# Altium PCB MAGIsUSBCore.PcbDoc
Units mm, origin at the board's own origin, x right, y up, seen from the top; angles counter-clockwise.
Board outline 152.4 x 101.6 mm, 2 copper layers (Top Layer, Bottom Layer); 26 components, 36 nets, 126 pads, 58 vias.
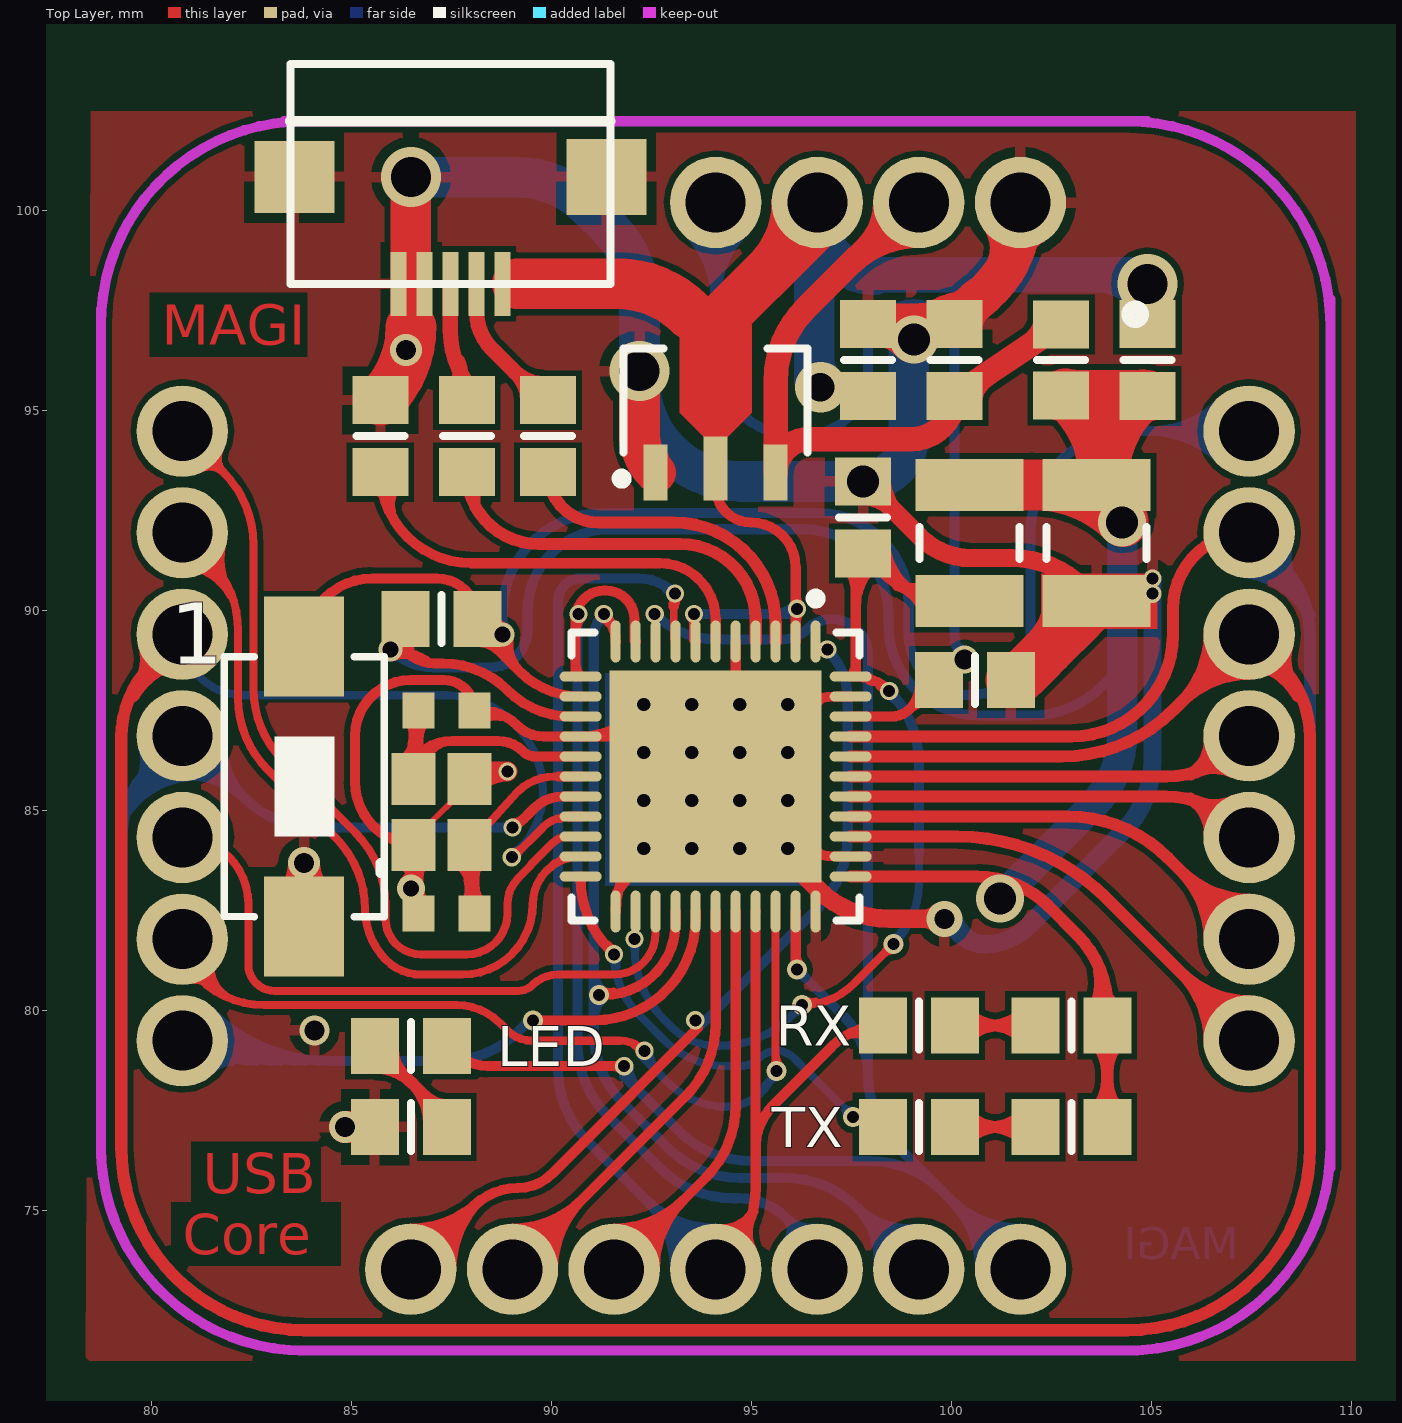
[diagram p0: Top Layer view]
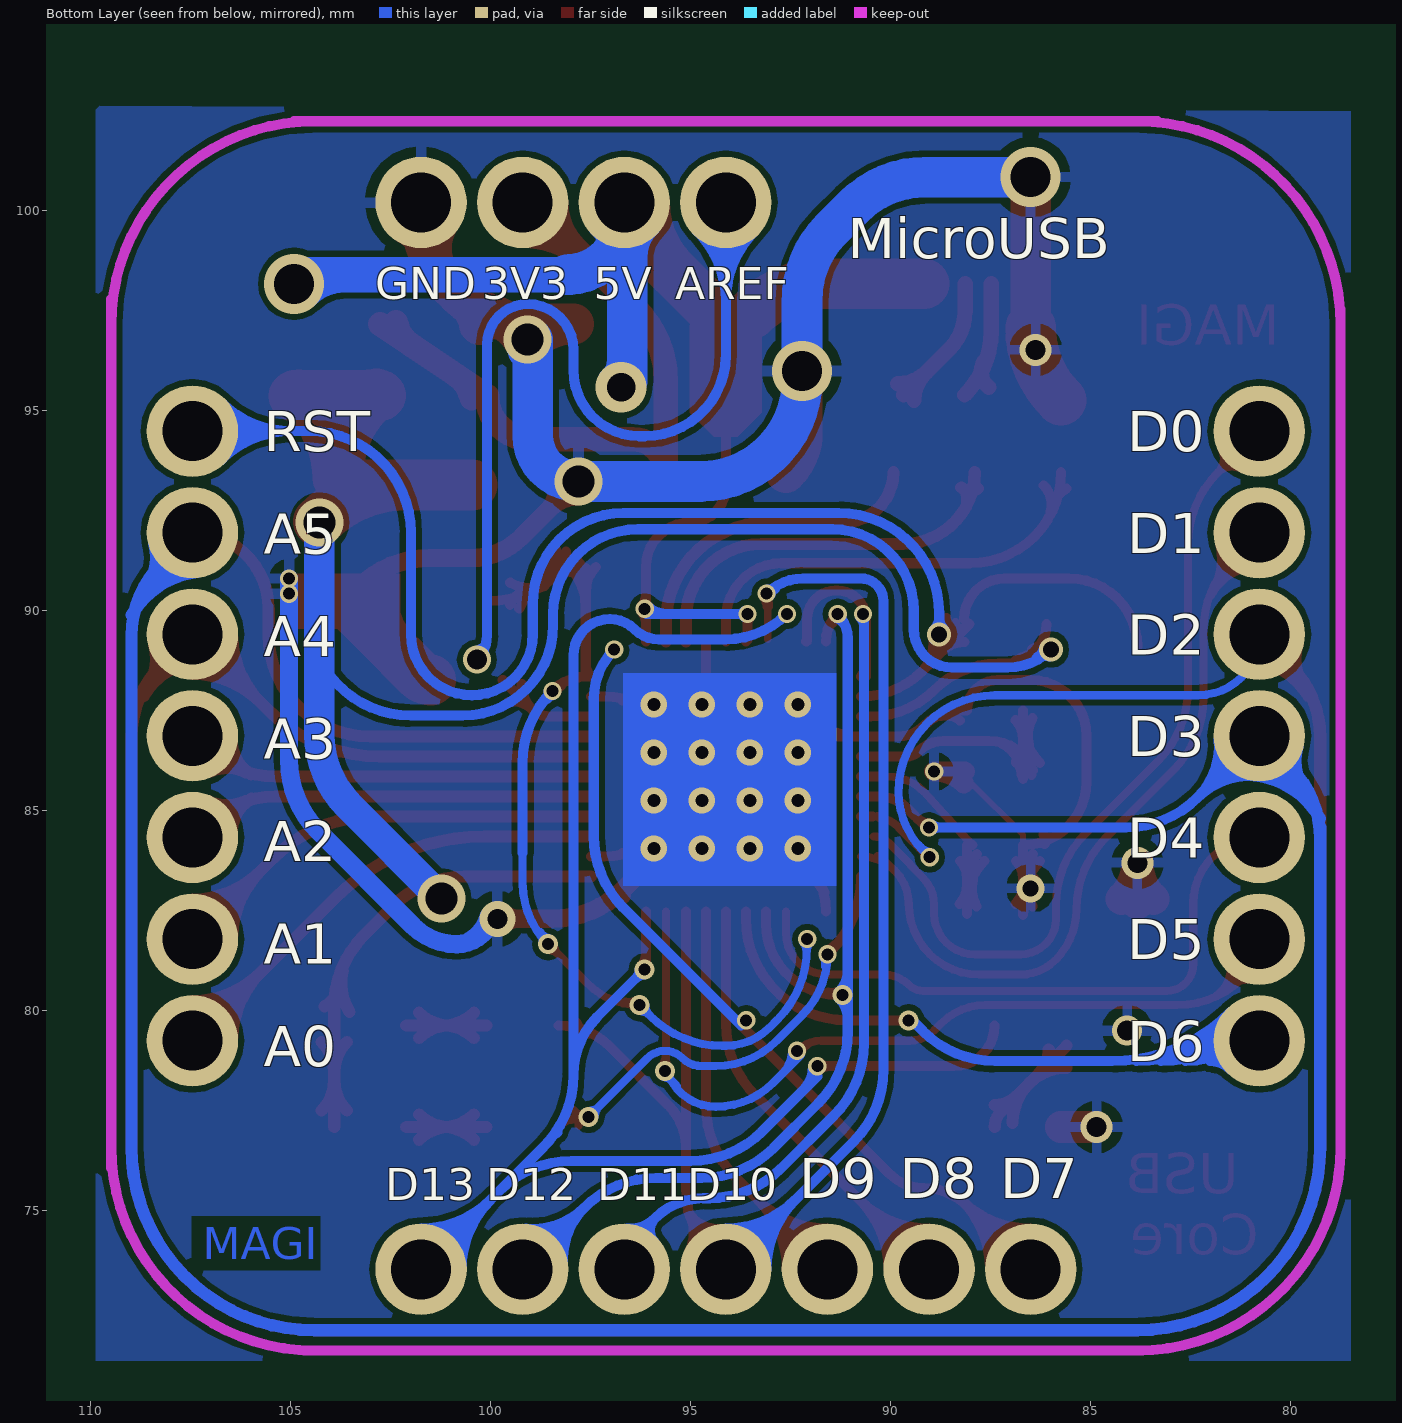
[diagram p1: Bottom Layer view, seen from below]

## Layer stack, top to bottom
Top Solder: solder mask 0.0102, Solder Resist, Dk 3.5
Top Layer: signal copper 0.0356
Dielectric1: dielectric 0.32, FR-4, Dk 4.8
Bottom Layer: signal copper 0.0356
Bottom Solder: solder mask 0.0102, Solder Resist, Dk 3.5

## Board outline
25.4,25.4 177.8,25.4 177.8,127 25.4,127

## Design rules (kind name [scope] priority, off if disabled: settings)
Clearance [All] p1: gap=0.152
PolygonConnect [All] p1: connectstyle=Relief reliefconductorwidth=0.254 reliefentries=4 polygonreliefangle="90 Angle" airgapwidth=0.254
RoutingVias [All] p1: holewidth=0.4 width=0.5 viastyle="Through Hole" minholewidth=0.3 minwidth=0.4 maxholewidth=0.711 maxwidth=1.27
SolderMaskExpansion [All] p1: expansion=0.102
Width [All] p1: maxlimit=2.54 minlimit=0.152 preferedwidth=0.254
29 further rules are at their usual default settings.

## Components (designator, comment, footprint, x,y, rotation, side; value= is the part's Value field where it differs from the comment)
1 "SW-PB" SW-1-SMD 83.82,85.598 r0 top (schematic designator S1)
C1 "10uf" 6-0805_N#1 97.917,96.266 r90 top
C2 "10uf" 6-0805_N#1 100.076,96.266 r90 top
C3 "CAP_1" 6-0805_N#1 85.725,94.361 r90 top
C4 "CAP_1" 6-0805_N#1 100.584,88.265 r180 top
C5 "CAP_1" 6-0805_N#1 97.79,92.329 r270 top
C6 "CAP_1" C1210_N 103.632,91.694 r90 top
C7 "CAP_1" 1608[0603] 87.376,87.503 r180 top
C8 "CAP_1" 1608[0603] 87.376,82.423 r180 top
Cry1 "SMD-Crystal" 3225 87.249,84.963 r90 top
J1 "MAGI-M8" MAGI-M8 94.107,86.868 r0 top
L1 "INDUCTOR" C1210_N 100.457,91.694 r90 top
LED1 "LED_3" 6-0805_N#1 99.187,79.629 r180 top
LED2 "LED_3" 6-0805_N#1 99.187,77.089 r180 top
LED3 "LED_3" 6-0805_N#1 86.487,77.089 r180 top
R1 "RES1" 6-0805_N#1 89.916,94.361 r270 top
R2 "RES1" 6-0805_N#1 87.884,94.361 r270 top
R3 "000" 6-0805_N#2 102.743,96.266 r270 top
R4 "000" 6-0805_N#1 104.902,96.266 r90 top
R5 "RES1" 6-0805_N#1 87.249,89.789 r180 top
R6 "RES1_1" 6-0805_N#1 102.997,79.629 r0 top
R7 "RES1_1" 6-0805_N#1 102.997,77.089 r0 top
R8 "RES1_1" 6-0805_N#1 86.487,79.121 r0 top
U1 "HS7333" HS7333 94.107,95.25 r90 top
U2 "USB" MicroUSB 87.63,100.711 r0 top
U3 "ATmega32U4-MU" 44PW_N 94.107,85.852 r270 top

## Footprints (in the part's own frame and the unit in brackets; to place one, negate y for a bottom-side part, rotate by r counter-clockwise, add the part's x,y. Pads: shape width x height; smd on the part's side, far side on the other; paste and mask are expansions set on the pad)
6-0805_N#1 [mm] "Chip Resistor, Body 2.0x1.2mm, IPC Medium Density"
  rect 1.2x1.4 smd: 1(-0.9,0) 2(0.9,0)
  silkscreen extent 0,-0.6 0,0.6, body extent -1.07,-0.7 1.07,0.7, height 0.7
6-0805_N#2 [mm] "Chip Resistor, Body 2.0x1.2mm, IPC Medium Density"
  rect 1.2x1.4 smd: 1(-0.889,0) 2(0.889,0)
  silkscreen extent 0,-0.6 0,0.6, body extent -1.07,-0.7 1.07,0.7, height 0.7
44PW_N [mm] "QFN, 44-Leads, Body 7x7mm, Pitch 0.5mm, IPC Medium Density"
  oval 1.05x0.25 smd: 1(-3.375,2.5) 2(-3.375,2) 3(-3.375,1.5) 4(-3.375,1) 5(-3.375,0.5) 6(-3.375,0) 7(-3.375,-0.5) 8(-3.375,-1) 9(-3.375,-1.5) 10(-3.375,-2) 11(-3.375,-2.5) 23(3.375,-2.5) 24(3.375,-2) 25(3.375,-1.5) 26(3.375,-1) 27(3.375,-0.5) 28(3.375,0) 29(3.375,0.5) 30(3.375,1) 31(3.375,1.5) 32(3.375,2) 33(3.375,2.5)
  oval 0.25x1.05 smd: 12(-2.5,-3.375) 13(-2,-3.375) 14(-1.5,-3.375) 15(-1,-3.375) 16(-0.5,-3.375) 17(0,-3.375) 18(0.5,-3.375) 19(1,-3.375) 20(1.5,-3.375) 21(2,-3.375) 22(2.5,-3.375) 34(2.5,3.375) 35(2,3.375) 36(1.5,3.375) 37(1,3.375) 38(0.5,3.375) 39(0,3.375) 40(-0.5,3.375) 41(-1,3.375) 42(-1.5,3.375) 43(-2,3.375) 44(-2.5,3.375)
  rect 5.3x5.3 smd: 45(0,0)
  silkscreen extent -4.57,-3.6 3.6,3.6, body extent -3.57,-3.57 3.57,3.57, height 1
1608[0603] [mm] "Chip Capacitor, Body 1.6x0.8mm, IPC High Density"
  rect 0.8x0.9 smd: 1(-0.7,0) 2(0.7,0)
  body extent -0.87,-0.48 0.87,0.48, height 1.3
3225 [mm] "SMD3225"
  rect 1.3x1.1 smd: 1(-0.826,-0.699) 2(0.826,-0.698) 3(0.826,0.699) 4(-0.826,0.698)
  silkscreen extent -1.52,1.52 -1.27,1.52
C1210_N [mm] "Chip Capacitor, Body 3.2x2.5mm, IPC Medium Density"
  rect 1.3x2.7 smd: 1(-1.45,0) 2(1.45,0)
  silkscreen extent -0.4,-1.25 0.4,1.25, body extent -1.7,-1.35 1.7,1.35, height 1.5
HS7333 [mm] "SOT89, 3-Leads, Body 4.50x2.50mm, Pitch 1.50mm, Lead Span 4.1mm, IPC Medium Density"
  rect 1.4x0.6 smd: 1(-1.8,1.5) 3(-1.8,-1.5)
  rect 1.6x0.6 smd: 2(-1.7,0)
  Top Layer region: -0.9,0.3 -0.3,0.9 1.9,0.9 2.5,0.3 2.5,-0.3 1.9,-0.9 -0.3,-0.9 -0.9,-0.3
  silkscreen extent -2.07,-2.3 1.3,2.47, body extent -1.3,-2.3 1.3,2.3, height 1.6
MAGI-M8 [mil]
  round 90 hole 59.06: 1(300,525) 2(200,525) 3(100,525) 4(0,525) 8(-525,300) 9(-525,200) 10(-525,100) 11(-525,0) 12(-525,-100) 13(-525,-200) 14(-525,-300) 15(-300,-525) 16(-200,-525) 17(-100,-525) 18(0,-525) 19(100,-525) 20(200,-525) 21(300,-525) 22(525,-300) 23(525,-200) 24(525,-100) 25(525,0) 26(525,100) 27(525,200) 28(525,300)
  Keep-Out Layer lines w10: -605,-415 -605,290 -605,420 ; -605,-405 ccw(c-405,-405) -405,-605 ; -605,405 cw(c-405,405) -405,605 ; -425,605 425,605 ; -410,-605 415,-605 ; 405,-605 ccw(c405,-405) 605,-405 ; 405,605 cw(c405,405) 605,405 ; 605,-425 605,430
MicroUSB [mm]
  rect 0.4x1.6 smd: 1(1.143,-2.54) 2(0.493,-2.54) 3(-0.157,-2.54) 4(-0.807,-2.54) 5(-1.457,-2.54)
  rect 2x1.8 smd: 6(-4.057,0.135)
  rect 2x1.9 smd: 7(3.743,0.135)
  silkscreen extent -4.16,-2.54 3.84,2.96, body extent -4.26,-2.64 3.94,3.06, height 3
SW-1-SMD [mm]
  rect 2x2.5 smd: 1(0,3.5) 2(0,-3.5)
  silkscreen extent -2,-3.25 2,3.25

## Part data
C1 C2: library part "CAPACITOR POL", "Capacitor"
C3 C4 C5 C6 C7 C8: "Capacitor"
Cry1: library part Crystal
R3 R4: library part RES1
U3: "8-bit AVR Microcontroller, 2.7-5.5V, 32KB Flash, 2.5KB EEPROM, 1KB SRAM, USB Controller, 44-pin QFN, Industrial Grade (-40癈 to 85癈)"

## Via types
v1: diameter 0.66, hole 0.33, Top Layer to Bottom Layer, tented top, 16 vias
v2: diameter 0.457, hole 0.3, Top Layer to Bottom Layer, 9 vias
v3: diameter 0.5, hole 0.3, Top Layer to Bottom Layer, 7 vias
v4: diameter 0.46, hole 0.3, Top Layer to Bottom Layer, 5 vias
v5: diameter 0.452, hole 0.3, Top Layer to Bottom Layer, 4 vias
v6: diameter 1.2, hole 0.8, Top Layer to Bottom Layer, 4 vias
v7: diameter 0.8, hole 0.5, Top Layer to Bottom Layer, 3 vias
v8: diameter 1.5, hole 1, Top Layer to Bottom Layer, 3 vias
v9: diameter 0.6, hole 0.4, Top Layer to Bottom Layer, 2 vias
v10: diameter 0.7, hole 0.4, Top Layer to Bottom Layer, 1 vias
v11: diameter 0.9, hole 0.5, Top Layer to Bottom Layer, 1 vias
v12: diameter 1.27, hole 0.711, Top Layer to Bottom Layer, 1 vias
v13: diameter 0.7, hole 0.5, Top Layer to Bottom Layer, 1 vias
v14: diameter 0.75, hole 0.5, Top Layer to Bottom Layer, 1 vias

## Nets (pads, with @x,y where several pads share a name; then routed paths per layer and width w, separated by ;. In a path a pad name is that pad's centre, name@x,y a point inside that pad or via, vN(x,y) a via of type N, cw(c..) or ccw(c..) an arc to the next point about the centre after c; other vN are vias at no path point)
3.3V: C2.1 J1.2 R3.1 U1.3 | length 21.6
  Top Layer w0.61: 97.45,98.645 cw(c99.187,96.908) J1.2@99.187,99.365 ; 97.883,99.079 ccw(c96.759,100.203) J1.2@98.349,100.203 ; J1.2 99.007,100.203 96.351,97.547 ccw(c98.147,95.751) 95.607,95.751 U1.3 cw(c96.443,93.45) 96.443,94.286 98.996,94.286 ccw(c98.996,95.366) C2.1 R3.1 ; C2.1@100.466,95.309 cw(c101.351,95.134) 100.849,95.884 ; 101.97,96.637 ccw(c101.468,97.387) R3.1@102.353,97.212
5V: C1.1 J1.3 R4.2 U1.2 U2.1 U3.2 U3.7 | length 41.2
  Top Layer w0.254: v5@93.495,89.846 cw(c93.326,89.677) 93.566,89.677 cw(c93.805,89.677) v5@93.636,89.846 ; v5(93.566,89.916) 93.566,89.268 U3.7 ; 94.107,95.123 U1.2 94.107,93.091 ccw(c94.996,93.091) 94.996,92.202 cw(c94.996,91.091) 96.107,91.091 U3.2 ; U3.2@96.107,89.717 cw(c96.465,89.717) v4@96.212,89.97 ; 96.107,90.369 ccw(c96.465,90.369) v4@96.212,90.116
  Top Layer w1.27: 89.154,98.171 91.785,98.171 ; 91.658,98.171 cw(c91.658,95.631) 93.454,97.427 ; 93.853,96.901 J1.3@96.584,99.632 ; 95.421,98.469 ccw(c93.686,100.203) J1.3@96.139,100.203
  Bottom Layer w0.254: v5(93.566,89.916) v4@96.086,89.916 ; v5@93.636,89.846 cw(c93.805,89.677) 93.805,89.916 cw(c93.805,90.155) v5@93.636,89.986 ; 95.584,89.916 ccw(c95.584,90.598) v4@96.066,90.116
  Bottom Layer w0.889: 98.005,98.402 104.902,98.402 v8(104.902,98.171) ; 103.607,98.402 cw(c103.607,96.876) v8@104.686,97.955
  Bottom Layer w1.016: J1.3@96.198,99.754 cw(c95.295,98.851) 96.572,98.851 ; 96.572,96.263 ccw(c97.405,96.263) v12@96.816,95.674 ; 96.572,98.489 cw(c98.361,98.489) J1.3@97.096,99.754 ; v12(96.726,95.584) 96.572,95.738 96.572,100.022 cw(c96.828,100.022) J1.3 96.647,99.839 ccw(c98.086,99.839) 98.005,98.402 ccw(c98.086,99.839) 98.086,98.4
  other v4: 96.139,90.043
A0: J1.22 U3.36 | length 18.2
  Top Layer w0.305: U3.36 100.149,84.352 cw(c100.149,79.067) 103.886,82.804 J1.22 ; J1.22@106.451,79.248 ccw(c104.06,79.248) 105.751,80.939 ccw(c107.442,82.63) J1.22@107.442,80.239 ; J1.22@106.756,79.248 ccw(c105.101,79.248) 106.271,80.419 ccw(c107.442,81.589) J1.22@107.442,79.934
A1: J1.23 U3.37 | length 17.4
  Top Layer w0.305: U3.37 102.919,84.852 cw(c102.919,81.329) 105.41,83.82 J1.23 ; J1.23@106.451,81.788 ccw(c104.06,81.788) 105.751,83.479 ccw(c107.442,85.17) J1.23@107.442,82.779 ; J1.23@106.756,81.788 ccw(c105.101,81.788) 106.271,82.959 ccw(c107.442,84.129) J1.23@107.442,82.474
A2: J1.24 U3.38 | length 14
  Top Layer w0.305: U3.38 105.366,85.352 cw(c105.366,82.812) 107.162,84.608 J1.24 ; 106.396,85.05 cw(c106.033,84.421) J1.24@106.758,84.373 ; J1.24@106.454,84.393 ccw(c105.489,84.457) 105.972,85.295 ccw(c106.567,86.326) J1.24@107.045,85.235 ; 106.494,84.994 ccw(c106.867,85.64) J1.24@107.167,84.956
A3: J1.25 U3.39 | length 14.7
  Top Layer w0.305: U3.39 105.374,85.852 ccw(c105.374,88.392) 107.17,86.596 J1.25 J1.25@106.68,86.868 ; 106.404,86.154 ccw(c106.048,86.77) J1.25@106.758,86.82 ; J1.25@106.454,86.799 cw(c105.507,86.732) 105.982,85.91 cw(c106.562,84.904) J1.25@107.037,85.964 ; 106.498,86.208 cw(c106.863,85.576) J1.25@107.162,86.242
A4: J1.10 J1.26 U3.19 U3.40 | length 103.1
  Top Layer w0.203: v2(89.012,83.835) 89.042,83.835 89.789,84.582 cw(c90.441,83.93) U3.19@90.441,84.852 ; v2@89.012,83.962 ccw(c89.012,84.341) 89.28,84.073 ; v2@89.139,83.835 cw(c89.373,83.835) 89.208,84.001 ; 90.219,84.793 ccw(c90.18,84.94) U3.19@90.312,84.864
  Top Layer w0.254: U3.19@90.441,84.852 U3.19
  Top Layer w0.305: 79.556,87.873 cw(c81.056,87.007) J1.10@80.853,88.727 ; 79.674,88.077 ccw(c78.447,88.785) J1.10@79.815,89.152 ; 79.86,88.4 cw(c80.967,87.761) J1.10@80.817,89.03 ; J1.10 79.992,88.628 ccw(c81.788,86.832) 79.248,86.832 79.248,76.581 ccw(c83.82,76.581) 83.82,72.009 104.394,72.009 ccw(c104.394,76.581) 108.966,76.581 108.966,86.832 ccw(c106.426,86.832) 108.222,88.628 J1.26 105.537,87.503 cw(c102.758,90.282) 102.758,86.352 U3.40 ; J1.26@106.451,89.408 cw(c104.06,89.408) 105.751,87.717 cw(c107.442,86.026) J1.26@107.442,88.417 ; J1.26@106.756,89.408 cw(c105.101,89.408) 106.271,88.237 cw(c107.442,87.067) J1.26@107.442,88.722 ; J1.26@107.361,88.727 cw(c107.158,87.007) 108.658,87.873 ; J1.26@107.397,89.03 cw(c107.247,87.761) 108.354,88.4 ; J1.26@108.399,89.152 ccw(c109.767,88.785) 108.54,88.077
  Bottom Layer w0.203: J1.10 ccw(c82.296,89.408) 82.296,87.884 87.375,87.884 cw(c87.375,85.471) 89.788,85.471 cw(c87.71,85.471) 89.179,84.002 v2(89.012,83.835) ; v2@88.991,83.96 ccw(c88.917,84.396) 89.277,84.14
A5: J1.11 J1.27 U3.18 U3.41 | length 104.2
  Top Layer w0.254: v5@89.027,84.681 ccw(c89.027,85.082) 89.31,84.799 ; v5@89.154,84.642 89.568,85.057 cw(c90.281,84.344) 90.281,85.352 U3.18
  Top Layer w0.305: U3.41 102.997,86.852 ccw(c102.997,89.392) 105.537,89.392 105.537,90.043 cw(c107.442,90.043) J1.27
  Bottom Layer w0.254: J1.11 82.314,85.326 ; J1.11@80.838,86.109 cw(c80.957,84.74) 81.928,85.712 cw(c82.9,86.683) J1.11@81.531,86.802 ; J1.11@80.86,85.856 cw(c81.018,84.03) 82.314,85.326 ; J1.11@81.784,86.78 ccw(c83.61,86.622) 82.314,85.326 ; v5@88.957,84.512 ccw(c88.788,84.343) 88.788,84.582 ccw(c88.788,84.821) v5@88.957,84.652 ; v5(89.027,84.582) 84.11,84.582 cw(c84.11,87.122) 82.314,85.326
  Bottom Layer w0.305: 79.248,84.292 cw(c81.788,84.292) 79.992,86.088 J1.11 ; 79.248,84.582 79.248,76.581 ccw(c83.82,76.581) 83.82,72.009 104.394,72.009 ccw(c104.394,76.581) 108.966,76.581 108.966,89.372 ccw(c106.426,89.372) 108.222,91.168 J1.27 ; 79.252,84.807 cw(c81.145,83.714) J1.11@80.888,85.884 ; 79.556,85.333 cw(c81.056,84.467) J1.11@80.853,86.187 ; 79.674,85.537 ccw(c78.447,86.245) J1.11@79.815,86.612 ; 79.86,85.86 cw(c80.967,85.221) J1.11@80.817,86.49 ; J1.27@107.326,90.964 cw(c107.069,88.794) 108.962,89.887 ; J1.27@107.361,91.267 cw(c107.158,89.547) 108.658,90.413 ; J1.27@107.397,91.57 cw(c107.247,90.301) 108.354,90.94 ; J1.27@108.399,91.692 ccw(c109.767,91.325) 108.54,90.617
AREF: C4.2 J1.4 U3.42 | length 34.8
  Top Layer w0.254: U3.42 98.505,87.352 ccw(c98.505,87.994) 98.959,87.54 ; C4.2@99.211,88.159 cw(c98.35,88.149) 98.959,87.54 ; C4.2@99.567,87.707 ccw(c99.409,87.09) 98.959,87.54 ; C4.2 98.959,87.54
  Bottom Layer w0.254: J1.4@93.389,99.485 cw(c91.654,97.75) 94.107,97.75 cw(c96.56,97.75) J1.4@94.825,99.485 ; J1.4@93.568,99.664 cw(c92.267,98.363) 94.107,98.363 cw(c95.947,98.363) J1.4@94.646,99.664 ; J1.4@93.748,99.844 cw(c92.881,98.977) 94.107,98.977 cw(c95.333,98.977) J1.4@94.466,99.844 ; J1.4 94.107,96.393 ccw(c96.139,96.393) 96.139,94.361 96.266,94.361 ccw(c96.266,96.012) 97.917,96.012 97.917,96.52 cw(c99.06,96.52) 99.06,97.663 cw(c99.06,96.647) 100.076,96.647 100.076,89.386 ccw(c100.943,89.386) v13(100.33,88.773) ; v13@100.124,88.86 ccw(c99.811,88.992) 100.106,89.162 ccw(c100.4,89.332) v13@100.358,88.994
AVCC: C5.2 L1.1 U3.24 U3.44 | length 33.5
  Top Layer w0.203: v3(96.266,80.137) ccw(c96.266,81.977) 97.567,80.676 v3(98.552,81.661) ; v3@96.343,80.264 ccw(c96.531,80.569) 96.614,80.221 ccw(c96.698,79.872) v3@96.393,80.06 ; v3@98.404,81.661 cw(c98.045,81.661) 98.299,81.408 cw(c98.552,81.154) v3@98.552,81.513
  Top Layer w0.254: C5.2@97.356,91.095 cw(c96.744,90.483) 97.609,90.483 ; U3.44 97.602,88.352 cw(c97.602,87.188) U3.44@97.609,88.352 ; U3.44 ccw(c97.18,88.654) 97.609,88.654 ; 97.609,90.092 cw(c99.027,90.092) C5.2@98.024,91.095 ; 97.609,90.705 cw(c98.414,90.705) C5.2@97.845,91.274 ; C5.2@97.609,91.059 U3.44@97.609,88.352 ; C5.2 98.231,90.988 ccw(c100.027,92.784) L1.1@100.027,90.244 ; U3.44@97.88,88.351 ccw(c98.091,88.471) 98.027,88.237 ; C5.2@97.983,90.965 cw(c98.088,90.441) C5.2@98.384,90.886 ; C5.2@98.105,91.472 ccw(c99.219,91.695) 98.589,90.75 ; v2@98.344,87.969 ccw(c98.106,87.91) 98.233,88.12 ccw(c98.36,88.33) v2@98.419,88.091 ; C5.2@98.354,91.522 ccw(c100.069,91.866) 99.099,90.41 ; v2(98.443,87.993) ccw(c97.602,87.188) U3.44@97.609,88.352 ; 98.64,90.616 cw(c98.397,89.71) L1.1@99.27,90.053 ; 98.718,90.595 ccw(c98.984,91.584) L1.1@99.495,90.697 ; L1.1@99.126,90.485 cw(c98.98,89.939) L1.1@99.507,90.146
  Bottom Layer w0.203: v2@91.997,81.688 cw(c91.864,81.518) 92.078,81.544 ; v2(92.075,81.788) 92.075,81.57 ccw(c94.615,81.57) 92.819,79.774 93.023,79.57 ccw(c94.107,80.654) 94.107,79.121 94.198,79.121 ccw(c94.198,81.661) 95.994,79.865 v3(96.266,80.137) ; 92.094,81.417 cw(c92.488,81.465) v2@92.175,81.71 ; v3@96.118,80.137 cw(c95.759,80.137) 96.013,79.884 cw(c96.266,79.63) v3@96.266,79.989 ; v3@98.52,81.806 ccw(c98.442,82.156) 98.744,81.963 ccw(c99.047,81.771) v3@98.697,81.693 ; v3(98.552,81.661) ccw(c97.019,83.194) 99.187,83.194 99.187,83.947
  Bottom Layer w0.254: v2@98.421,87.893 cw(c98.37,87.653) 98.577,87.786 ; v2@98.425,88.011 v2(98.443,87.993) cw(c96.647,86.197) 99.187,86.197 99.187,83.947 ; v2@98.542,87.971 ccw(c98.781,87.92) 98.576,87.787
D0: J1.8 U3.20 | length 23
  Top Layer w0.203: J1.8 81.806,93.454 ; J1.8@81.138,93.734 cw(c81.316,93.368) 81.604,93.656 cw(c81.892,93.944) J1.8@81.526,94.122 ; J1.8@81.227,93.551 cw(c81.448,93.096) 81.806,93.454 ; J1.8@81.709,94.033 ccw(c82.164,93.812) 81.806,93.454 ; U3.20@90.409,84.352 ccw(c90.409,83.832) 90.042,84.2 89.495,83.653 89.495,83.635 89.172,83.312 ccw(c89.827,82.656) 88.9,82.656 88.9,82.423 cw(c87.884,82.423) 87.884,81.407 86.741,81.407 cw(c86.741,82.296) 85.852,82.296 85.852,82.641 ccw(c83.312,82.641) 85.108,84.437 83.294,86.251 cw(c85.09,88.047) 82.55,88.047 82.55,91.658 ccw(c80.01,91.658) 81.806,93.454
D1: J1.9 U3.21 | length 25.3
  Top Layer w0.203: J1.9@80.768,91.11 cw(c80.763,89.743) 81.934,90.447 ; J1.9@80.769,91.313 cw(c80.764,90.165) 81.749,90.756 ; J1.9@80.77,91.516 cw(c80.766,90.587) 81.563,91.065 ; J1.9 81.425,91.295 cw(c79.629,89.499) 82.169,89.499 82.169,87.811 ccw(c84.709,87.811) 82.913,86.015 84.6,84.328 cw(c82.804,82.531) 85.344,82.531 ccw(c87.139,82.531) 85.87,81.262 ccw(c86.747,82.139) 86.747,80.899 87.768,80.899 ccw(c87.768,82.666) 89.535,82.666 cw(c90.713,82.666) 89.88,83.499 cw(c90.732,82.647) U3.21 ; J1.9@81.585,91.745 ccw(c82.807,91.44) 81.727,90.791 ; J1.9@81.782,91.696 ccw(c83.48,91.272) 81.98,90.371 ; 90.063,83.673 ccw(c89.957,84.069) U3.21@90.312,83.864
D4: J1.12 U3.25 | length 15.9
  Top Layer w0.203: J1.12 cw(c80.772,82.677) 82.423,82.677 82.423,81.153 ccw(c83.083,81.153) 83.083,80.493 89.167,80.493 ccw(c89.167,81.013) 89.535,80.645 cw(c90.148,80.032) 90.148,80.899 91.567,80.899 ccw(c91.567,81.939) 92.607,81.939 U3.25
D5: J1.13 U3.31 | length 26.6
  Top Layer w0.203: J1.13@80.874,81.27 ccw(c81.233,81.27) 80.979,81.016 81.171,80.825 ccw(c82.831,82.485) 82.831,80.137 87.63,80.137 cw(c87.63,78.604) 88.714,79.688 88.9,79.502 ccw(c89.513,80.115) 89.513,79.248 91.716,79.248 cw(c91.716,78.381) v2(92.329,78.994) ; J1.13@80.967,80.765 cw(c81.072,80.215) 81.387,80.678 ; J1.13@81.171,81.622 ccw(c81.931,81.305) 81.468,80.623 ; J1.13@81.358,81.544 ccw(c82.166,81.207) 81.674,80.483 ; J1.13@81.546,81.465 ccw(c82.401,81.109) 81.88,80.343 ; v2@92.206,78.961 ccw(c91.91,78.882) 92.063,79.147 ccw(c92.217,79.413) v2@92.296,79.117 ; v3@95.526,78.591 ccw(c95.331,78.786) 95.607,78.786 ; v3@95.607,78.486 U3.31 ; 95.607,78.902 ccw(c96.047,78.902) v3@95.736,78.591
  Bottom Layer w0.203: v2@92.227,78.892 92.928,78.191 ccw(c94.361,79.624) 94.361,77.597 ccw(c94.361,78.867) v3@95.577,78.502 ; v2@92.456,78.994 ccw(c93.256,78.994) 92.69,78.428 ; 95.328,78.099 cw(c95.79,77.813) v3@95.665,78.342
  other v3: 95.631,78.486
D6: J1.14 U3.27 | length 24.1
  Top Layer w0.254: v3(89.535,79.756) 91.067,79.756 ccw(c91.067,82.296) 93.607,82.296 U3.27
  Bottom Layer w0.254: J1.14@80.952,79.428 ccw(c82.612,81.088) 82.612,78.74 ; J1.14@81.131,79.607 ccw(c83.225,81.701) 83.225,78.74 ; J1.14@81.28,78.74 cw(c81.28,79.248) J1.14 ccw(c81.998,80.474) 81.998,78.74 ccw(c81.998,78.022) J1.14@81.49,78.53 ; J1.14@81.311,79.787 ccw(c83.838,82.314) 83.838,78.74 ; J1.14@81.49,79.966 ccw(c84.451,82.927) 84.451,78.74 87.38,78.74 ccw(c87.38,81.28) 89.176,79.484 89.448,79.756 v3(89.535,79.756)
D7: J1.15 U3.1 | length 29.2
  Top Layer w0.254: J1.15 88.07,75.116 cw(c89.154,74.032) 89.154,75.565 ccw(c89.154,76.791) 90.021,75.924 90.38,76.283 v2@93.662,79.566 ; J1.15@86.487,74.041 ccw(c86.487,75.267) 87.354,74.4 ccw(c88.221,73.533) J1.15@86.995,73.533 ; J1.15@86.487,74.295 ccw(c86.487,76.135) 87.788,74.834 ccw(c89.089,73.533) J1.15@87.249,73.533 ; J1.15@86.487,74.549 ccw(c86.487,77.002) 88.221,75.267 ccw(c89.956,73.533) J1.15@87.503,73.533
  Bottom Layer w0.254: v2@93.726,79.629 96.665,82.568 ccw(c94.869,84.364) 97.409,84.364 97.409,87.801 ccw(c95.675,87.801) v4(96.901,89.027)
  other v2: 93.599,79.756
D8: J1.16 U3.28 | length 19.6
  Top Layer w0.254: J1.16 93.363,77.869 ccw(c91.567,79.665) 94.107,79.665 U3.28 ; J1.16@89.027,74.041 ccw(c89.027,75.267) 89.894,74.4 ccw(c90.761,73.533) J1.16@89.535,73.533 ; J1.16@89.027,74.295 ccw(c89.027,76.135) 90.328,74.834 ccw(c91.629,73.533) J1.16@89.789,73.533 ; J1.16@89.027,74.549 ccw(c89.027,77.002) 90.761,75.267 ccw(c92.496,73.533) J1.16@90.043,73.533
D9: J1.17 U3.29 | length 18.8
  Top Layer w0.254: J1.17 93.863,75.829 ccw(c92.067,77.625) 94.607,77.625 U3.29 ; J1.17@91.567,74.041 ccw(c91.567,75.267) 92.434,74.4 ccw(c93.301,73.533) J1.17@92.075,73.533 ; J1.17@91.567,74.295 ccw(c91.567,76.135) 92.868,74.834 ccw(c94.169,73.533) J1.17@92.329,73.533 ; J1.17@91.567,74.549 ccw(c91.567,77.002) 93.301,75.267 ccw(c95.036,73.533) J1.17@92.583,73.533
D10: J1.18 LED1.2 U3.8 U3.30 | length 50.5
  Top Layer w0.178: U3.8@93.06,89.274 93.06,90.172
  Top Layer w0.254: 93.06,90.11 cw(c93.405,90.11) v5@93.161,90.354 ; 93.06,90.171 cw(c93.273,90.171) v5@93.149,90.343 ; 93.06,90.172 93.091,90.203 v5(93.091,90.424) ; J1.18 94.363,73.789 ccw(c92.567,75.585) 95.107,75.585 95.107,76.581 ; J1.18@94.183,74.291 ccw(c94.251,74.98) 94.851,74.634 ; J1.18@94.208,74.544 ccw(c94.294,75.409) 95.047,74.975 ccw(c95.954,74.451) J1.18@95.017,73.985 ; J1.18@94.789,73.872 cw(c95.445,74.198) 94.811,74.565 ; U3.30 95.102,82.472 95.102,77.094 95.107,77.089 95.107,76.581 ; LED1.2@97.847,79.702 cw(c97.425,79.867) 97.542,79.429 cw(c97.62,79.14) LED1.2@97.878,79.291 ; LED1.2 ccw(c98.287,77.816) 97.005,79.098 95.545,77.638 ccw(c96.601,76.581) 95.107,76.581
  Bottom Layer w0.254: v5@92.995,90.398 ccw(c92.764,90.336) 92.884,90.544 ccw(c93.003,90.751) v5@93.065,90.52 ; J1.18@93.091,73.533 ccw(c90.638,73.533) 92.373,75.267 ccw(c94.107,77.002) J1.18@94.107,74.549 ; v5(93.091,90.424) ccw(c92.171,89.504) 92.171,90.805 90.734,90.805 ccw(c90.734,90.24) 90.169,90.24 90.169,78.524 ccw(c92.709,78.524) 90.913,76.727 J1.18 ; J1.18@93.345,73.533 ccw(c91.505,73.533) 92.806,74.834 ccw(c94.107,76.135) J1.18@94.107,74.295 ; J1.18@93.599,73.533 ccw(c92.373,73.533) 93.24,74.4 ccw(c94.107,75.267) J1.18@94.107,74.041
D11: J1.19 U3.10 U3.12 | length 27
  Top Layer w0.254: U3.12@90.605,88.352 90.605,89.792 cw(c91.313,89.792) 91.313,90.5 91.364,90.5 cw(c91.364,89.789) 92.075,89.789 92.075,89.259 ccw(c92.107,89.259) U3.10 ; 90.605,88.654 ccw(c91.034,88.654) U3.12 ; 90.605,89.491 cw(c91.103,89.491) v4@90.751,89.843
  Bottom Layer w0.254: 90.653,89.606 cw(c90.988,89.606) v4@90.751,89.843 ; v4(90.678,89.916) ccw(c90.739,89.855) 90.653,89.855 90.653,79.183 ccw(c93.193,79.183) 91.397,77.386 92.728,76.055 ccw(c94.524,77.851) 94.524,75.311 94.659,75.311 cw(c94.659,73.577) 95.885,74.803 ; J1.19@95.898,74.219 ccw(c95.587,74.504) 95.885,74.803 ; 96.073,74.615 cw(c95.782,74.325) J1.19@96.085,74.048 ; J1.19@96.574,74.546 cw(c96.51,75.428) 95.885,74.803 ; J1.19 ccw(c95.421,73.533) 96.288,74.4 95.885,74.803
D12: J1.20 U3.11 U3.26 | length 33.8
  Top Layer w0.254: v3(91.186,80.391) 91.313,80.391 ccw(c91.313,82.185) 93.107,82.185 U3.26 ; v3@91.249,80.497 ccw(c91.455,80.844) 91.555,80.453 ; v4@91.286,89.817 cw(c91.217,89.559) 91.448,89.692 ; v4(91.313,89.916) 91.328,89.901 cw(c90.653,89.227) U3.11 ; v4@91.412,89.889 ccw(c91.635,89.83) 91.436,89.715
  Bottom Layer w0.254: 91.059,79.787 cw(c91.79,79.787) v3@91.273,80.304 ; 91.059,80.995 ccw(c91.79,80.995) v3@91.273,80.478 ; v4@91.214,89.889 cw(c90.973,89.825) 91.189,89.701 cw(c91.404,89.576) v4@91.34,89.817 ; v4(91.313,89.916) ccw(c91.926,89.303) 91.059,89.303 91.059,79.475 ccw(c93.599,79.475) 91.803,77.679 92.919,76.563 ccw(c94.715,78.359) 94.715,75.819 95.849,75.819 cw(c95.849,73.279) 97.645,75.075 ; J1.20@98.175,73.621 ccw(c96.349,73.779) 97.645,75.075 ; J1.20@98.428,73.599 ccw(c97.059,73.718) 98.031,74.689 ccw(c99.002,75.661) J1.20@99.121,74.292 ; J1.20@98.982,74.028 cw(c98.487,73.533) J1.20 97.645,75.075 ; J1.20@99.099,74.545 cw(c98.941,76.371) 97.645,75.075
D13: J1.21 R8.2 U3.9 U3.32 | length 52.2
  Top Layer w0.254: R8.2@87.387,79.629 ccw(c88.403,79.629) 88.403,78.613 v4(91.821,78.613) ; v4@91.748,78.54 ccw(c91.572,78.364) 91.572,78.613 ccw(c91.572,78.862) v4@91.748,78.686 ; 96.107,81.4 ccw(c96.513,81.4) v3@96.226,81.113 ; U3.32 96.107,81.103 ccw(c96.216,81.103) v3(96.139,81.026)
  Bottom Layer w0.254: 91.821,78.359 93.196,76.984 ccw(c94.992,78.78) 94.992,76.24 97.968,76.24 cw(c97.968,73.7) 99.764,75.496 ; v4@91.924,78.613 ccw(c92.786,78.613) 92.176,78.004 ; v5(92.583,89.916) ccw(c94.116,91.449) 94.116,89.281 95.78,89.281 ccw(c95.78,90.148) 96.393,89.535 cw(c97.006,88.922) 97.006,89.789 cw(c97.006,88.878) 97.917,88.878 97.917,78.395 ; v3@96.139,80.903 cw(c96.139,80.606) 96.349,80.816 cw(c96.559,81.026) v3@96.262,81.026 ; v3(96.139,81.026) 97.314,79.851 cw(c95.858,78.395) 97.917,78.395 ; 98.322,76.956 ccw(c98.381,77.015) 98.381,76.931 ; J1.21@100.711,73.533 ccw(c98.258,73.533) 99.993,75.267 ccw(c101.727,77.002) J1.21@101.727,74.549 ; J1.21@100.965,73.533 ccw(c99.125,73.533) 100.426,74.834 ccw(c101.727,76.135) J1.21@101.727,74.295 ; J1.21@101.219,73.533 ccw(c99.993,73.533) 100.86,74.4 ccw(c101.727,75.267) J1.21@101.727,74.041 ; J1.21 99.764,75.496 ; 97.917,78.395 ccw(c100.457,78.395) 98.381,76.931 ; 98.381,76.931 ccw(c100.457,78.395) 98.661,76.599 99.764,75.496
D+: R2.2 U3.4 | length 10.7
  Top Layer w0.305: R2.2@87.802,93.052 cw(c87.599,92.596) 88.081,92.725 cw(c88.392,92.809) R2.2@88.221,93.081 ; R2.2 ccw(c89.679,93.461) 89.679,91.666 93.218,91.666 cw(c93.218,89.777) 95.107,89.777 U3.4
D-: R1.2 U3.3 | length 8.3
  Top Layer w0.305: R1.2 ccw(c91.175,93.461) 91.175,92.202 93.067,92.202 cw(c93.067,89.662) 95.607,89.662 U3.3
GND: 1.2 C1.2 C2.2 C3.2 C4.1 C5.1 C6.1 C7.1 C8.2 Cry1.2 Cry1.4 J1.1 LED3.2 U1.1 U2.4 U2.5 U2.6 U2.7 U3.5 U3.15 U3.23 U3.33 U3.35 U3.43 U3.45 | length 166.6
  Top Layer w0.152: Cry1.4@86.677,84.138 86.677,84.391 Cry1.2@88.011,85.725 ; 102.753,89.365 ccw(c102.753,89.445) 102.833,89.445
  Top Layer w0.254: Cry1.4@86.134,84.165 ccw(c85.939,84.131) 85.99,84.322 ccw(c86.028,84.462) Cry1.4@86.162,84.405 ; Cry1.4@86.251,83.738 cw(c85.223,82.71) C8.2@86.677,82.71 ; v10@86.329,83.216 ccw(c85.489,84.056) Cry1.4@86.677,84.056 ; C8.2@86.389,82.858 cw(c86.165,82.397) C8.2@86.677,82.397 ; Cry1.4@86.431,83.918 cw(c85.836,83.323) 86.677,83.323 cw(c87.265,83.323) Cry1.4@86.85,83.738 ; C8.2@86.44,82.609 ccw(c85.683,83.046) v10@86.527,83.272 ; C8.2@86.483,82.666 ccw(c86.013,83.136) v10@86.677,83.136 ; v10@86.509,83.036 ccw(c86.102,83.443) 86.677,83.443 ; v10@86.605,82.98 ccw(c87.035,83.095) C8.2@86.812,82.709 ; C8.2 86.677,82.424 86.677,84.138 cw(c86.677,85.725) 85.09,85.725 85.09,86.868 cw(c86.487,86.868) 86.487,88.265 87.314,88.265 cw(c87.314,87.503) C7.1 88.234,87.503 cw(c88.234,86.202) 89.154,87.122 ccw(c89.806,87.774) 89.806,86.852 U3.15 ; v10@86.677,83.128 ccw(c87.331,83.128) C8.2@86.869,82.666 ; C7.1@88.261,87.252 cw(c88.604,86.879) 88.735,87.369 ; C7.1@88.312,87.589 ccw(c88.619,87.767) 88.528,87.424 ; 91.295,86.852 ccw(c91.295,88.333) U3.45@92.406,87.353 ; U3.23 cw(c93.719,82.477) 92.226,83.971 v1(92.307,84.052) v1(93.507,85.252) U3.45 ; U3.23@91.641,82.958 cw(c93.004,82.171) U3.45@93.456,83.678 ; 91.75,83.133 cw(c92.963,82.721) U3.45@92.397,83.87 ; 91.761,83.167 ccw(c89.689,84.363) U3.45@91.957,85.127 ; U3.45@91.789,83.224 ccw(c91.102,83.958) U3.45@92.105,84.036 ; U3.45@91.801,83.236 cw(c93.099,82.487) U3.45@93.529,83.922 ; U3.45@91.814,87.255 ccw(c91.433,87.829) U3.45@92.108,87.692 ; U3.45@91.947,83.714 cw(c92.58,83.499) U3.45@92.284,84.098 ; U3.45@91.959,85.104 ccw(c93.279,85.232) U3.45@92.436,84.209 ; U3.45@91.962,83.514 cw(c93.193,82.803) U3.45@93.602,84.165 ; U3.45@91.97,83.522 ccw(c91.537,83.909) U3.45@92.107,84.015 ; U3.45@91.995,84.93 cw(c92.37,85.143) U3.45@92.155,85.516 ; U3.45@92,83.581 cw(c92.512,83.285) U3.45@92.359,83.856 ; U3.45@92.012,83.583 cw(c92.438,83.397) U3.45@92.347,83.853 ; U3.45@92.018,84.494 ccw(c92.728,84.563) U3.45@92.275,84.013 ; U3.45@92.043,83.653 ccw(c90.399,84.603) U3.45@92.197,85.209 ; U3.45@92.048,87.41 cw(c92.209,87.167) U3.45@92.267,87.453 ; U3.45@92.069,87.13 ccw(c91.711,87.669) U3.45@92.358,87.651 ; U3.45@92.072,83.705 ccw(c91.735,83.899) U3.45@92.111,84 ; U3.45@92.123,83.792 cw(c93.288,83.119) U3.45@93.674,84.408 ; U3.45@92.122,84.708 cw(c92.498,84.921) U3.45@92.282,85.296 ; U3.45@92.175,83.586 ccw(c91.777,84.011) U3.45@92.358,84.056 ; U3.45@92.215,84.771 ccw(c93.028,84.768) U3.45@92.451,84.195 ; U3.45@92.215,87.521 cw(c90.732,88.83) U3.15 ; U3.45@92.248,84.485 cw(c92.625,84.7) U3.45@92.408,85.076 ; U3.45@92.307,84.255 ccw(c92.307,84.745) 92.654,84.399 ccw(c93,84.052) 92.51,84.052 cw(c92.818,84.052) U3.45@92.6,84.27 ; U3.45@92.385,84.239 ccw(c92.466,84.434) U3.45@92.615,84.285 ; U3.45@92.412,84.226 ccw(c92.863,84.971) U3.45@93.071,84.125 ; U3.45@92.701,83.946 ccw(c92.728,84.878) U3.45@93.368,84.2 ; U3.45@92.741,84.19 cw(c92.715,83.305) U3.45@93.359,83.913 ; U3.45@93.206,84.005 ccw(c93.617,84.069) U3.45@93.528,83.663 ; U3.45@93.206,84.102 ccw(c93.581,84.04) U3.45@93.499,83.669 ; U3.45@93.304,85.252 cw(c92.814,85.252) 93.16,84.905 cw(c93.507,84.559) U3.45@93.507,85.049 ; U3.45@93.507,85.455 ccw(c93.507,85.945) 93.854,85.599 ccw(c94.2,85.252) U3.45@93.71,85.252 ; U3.45@94.06,85.778 cw(c94.964,85.205) U3.45@94.748,86.253 ; U3.45@94.38,86.283 cw(c94.796,86.02) U3.45@94.697,86.502 ; U3.45@94.607,87.051 cw(c95.152,87.051) U3.45@94.828,87.489 ; U3.45@94.607,88.383 ccw(c95.438,88.383) U3.45@94.851,87.796 ; U3.5 94.607,87.059 cw(c92.9,87.059) U3.45 ; U3.45@95.363,84.596 ccw(c97.159,86.392) 97.159,83.852 U3.35 ; U3.45@95.363,87.108 cw(c97.159,85.312) 97.159,87.852 U3.43 ; U3.45@95.38,84.583 cw(c94.869,83.911) U3.45@95.706,84.025 ; U3.45@95.38,87.121 ccw(c94.869,87.793) U3.45@95.706,87.679 ; U3.45@96.003,83.873 cw(c96.437,83.069) U3.45@96.699,83.944 ; U3.45@96.003,87.831 ccw(c96.437,88.635) U3.45@96.699,87.76 ; U3.15 92.055,86.852 cw(c92.055,84.312) 93.851,86.108 U3.45 ; U3.45@92.368,83.626 ccw(c92.192,85.084) 93.347,84.177 cw(c92.192,85.084) U3.45@92.368,83.626 ; U3.45@92.977,83.7 ccw(c92.874,84.549) 93.547,84.021 cw(c92.874,84.549) U3.45@92.977,83.7
  Top Layer w0.457: U3.45 ccw(c94.733,85.852) U3.45@94.29,85.409 ; U3.45@94.664,85.344 cw(c94.524,85.642) U3.45@94.29,85.409 ; U3.45@94.751,84.949 ccw(c94.818,85.016) U3.45@94.858,84.93 ; U3.45@94.808,85.252 ccw(c95.679,85.252) U3.45@95.064,84.636 ; U3.45@95.291,84.409 ccw(c95.907,85.024) U3.45@95.907,84.153 ; U3.45@96.008,84.052 ccw(c96.879,84.052) U3.45@96.264,83.436 ; 96.631,83.068 cw(c96.44,82.877) U3.33@96.711,82.877 ; C5.1@97.79,92.858 cw(c97.79,91.867) 98.49,92.568 ; v6(97.79,93.229) 97.829,93.229 99.212,91.846 ccw(c100.498,93.132) 100.498,91.313 101.511,91.313 cw(c101.511,88.773) 103.307,90.569 C6.1@103.579,90.297 ; C5.1@97.813,93.312 cw(c97.586,92.503) C5.1@98.398,92.72 ; C5.1@97.89,92.858 cw(c97.89,92.109) C5.1@98.419,92.638 ; C5.1@98.161,93.229 ccw(c98.964,93.229) C5.1@98.397,92.661 ; C5.1@98.261,93.229 ccw(c99.306,93.229) 98.567,92.49 ; v11@99.665,82.139 ccw(c99.287,81.761) 99.287,82.296 ccw(c99.287,82.831) v11@99.665,82.453 ; v11(99.822,82.296) 98.456,82.296 cw(c98.456,84.836) 96.66,83.04 U3.45@94.29,85.409 ; 102.567,90.996 cw(c102.164,90.299) C6.1@102.968,90.241 ; C6.1 C6.1@103.579,90.297 ; C6.1@104.394,90.297 C6.1@103.579,90.297
  Top Layer w0.508: Cry1.2@88.138,85.979 v2(88.9,85.979) ; Cry1.2@88.157,85.679 cw(c88.881,84.955) v2@88.881,85.979
  Top Layer w0.8: 1.2@83.419,82.794 ccw(c82.613,83.693) v7(83.82,83.693) ; 1.2@83.82,82.677 v7(83.82,83.693) ; 1.2@84.221,82.794 cw(c85.027,83.693) v7(83.82,83.693) ; v7(84.836,77.089) LED3.2 LED3.2@85.725,77.089
  Top Layer w1.016: 86.487,97.075 v8(86.487,100.838) ; v8(92.202,95.99) 92.202,94.428 ccw(c93.585,94.428) U1.1 ; v6@98.994,96.71 ccw(c97.917,95.667) C1.2 99.024,97.166 ccw(c99.024,99.706) 100.82,97.91 100.983,98.073 ccw(c99.187,99.869) 101.727,99.869 J1.1 ; v6@99.14,96.728 cw(c100.479,95.955) C2.2@100.079,97.449 ; C2.2@100.266,97.149 cw(c101.316,96.956) 100.711,97.835 ; J1.1@101.218,99.823 cw(c100.209,99.07) 101.425,98.744 ; 101.468,98.901 cw(c102.663,98.581) J1.1@102.044,99.653 ; 92.202,94.326 ccw(c93.083,94.326) 92.46,93.703 cw(c93.083,94.326) 92.202,94.326
  Top Layer w1.27: C3.2 85.743,95.279 ccw(c83.947,97.075) 86.487,97.075 ; C4.1 ccw(c101.484,88.673) 101.772,88.384 102.753,89.365 ccw(c102.196,89.923) C6.1@102.918,90.238 ; 102.411,89.023 ccw(c101.191,90.244) C6.1@102.917,90.244 ; 102.833,89.445 C6.1
  Bottom Layer w0.457: v11(99.822,82.296) 99.822,82.295 100.185,81.931 ccw(c100.838,82.584) 100.838,81.661 ccw(c100.838,83.194) 101.922,82.11 104.285,84.473 ccw(c102.489,86.269) 105.029,86.269 v2(105.029,90.805) ; v11@100.036,82.353 ccw(c100.995,82.61) 100.498,81.751
  Bottom Layer w1.016: v8(86.487,100.838) 89.118,100.838 cw(c89.118,98.298) 90.914,100.094 91.458,99.55 cw(c89.662,97.754) 92.202,97.754 v8(92.202,95.99) 92.202,95.769 ccw(c94.742,95.769) 94.742,93.229 v6(97.79,93.229) ccw(c97.79,94.372) 98.933,94.372 98.933,96.774 v6@99.06,96.647 ; v6@99.06,96.52 v6(99.06,96.774)
  other v1: 93.507,84.052 94.707,84.052 95.907,84.052 92.307,85.252 94.707,85.252 95.907,85.252 92.307,86.452 93.507,86.452 94.707,86.452 95.907,86.452 92.307,87.652 93.507,87.652 94.707,87.652 95.907,87.652
  other v2: 105.029,90.424
  other v7: 86.36,96.52
  other v10: 86.487,83.058
  other v14: 84.074,79.502
NetC3_1: C3.1 U3.6 | length 12.4
  Top Layer w0.254: C3.1@85.588,93.051 cw(c85.182,92.348) 85.967,92.558 ; C3.1 ccw(c88,93.461) 88,91.186 92.71,91.186 cw(c92.71,89.789) 94.107,89.789 U3.6 ; 85.986,92.485 cw(c86.626,92.657) C3.1@86.159,93.126
NetLED1_1: LED1.1 R6.1 | length 5.4
  Top Layer w0.305: LED1.1 R6.1 ; LED1.1@100.404,79.312 cw(c101.168,78.548) 101.168,79.629 cw(c101.168,80.71) LED1.1@100.404,79.946 ; R6.1@101.781,79.312 ccw(c101.016,78.548) 101.016,79.629 ccw(c101.016,80.71) R6.1@101.781,79.946
NetLED2_1: LED2.1 R7.1 | length 5.4
  Top Layer w0.305: LED2.1 R7.1 ; LED2.1@100.404,76.772 cw(c101.168,76.008) 101.168,77.089 cw(c101.168,78.17) LED2.1@100.404,77.406 ; R7.1@101.781,76.772 ccw(c101.016,76.008) 101.016,77.089 ccw(c101.016,78.17) R7.1@101.781,77.406
NetLED3_1: LED3.1 R8.1 | length 6.1
  Top Layer w0.305: R8.1@85.587,78.573 cw(c85.587,77.251) 86.522,78.186 ; R8.1 87.223,77.485 cw(c86.827,77.089) LED3.1 ; R8.1@86.035,79.021 ccw(c86.874,79.021) 86.28,78.428 ; 86.529,78.179 cw(c85.54,77.189) LED3.1@86.939,77.189 ; 86.848,77.86 ccw(c87.387,78.398) LED3.1@87.387,77.637
NetR1_1: R1.1 U2.2 | length 4.9
  Top Layer w0.381: U2.2@88.123,97.484 U2.2 ; U2.2@88.127,97.484 ccw(c89.483,97.484) 88.525,96.526 R1.1@89.662,95.388 ; 89.071,95.979 ccw(c89.816,96.724) R1.1@89.816,95.671 ; 89.136,95.914 cw(c88.483,95.261) R1.1@89.407,95.261
NetR2_1: R2.1 U2.3 | length 3.7
  Top Layer w0.381: U2.3 87.473,96.994 ccw(c89.744,96.994) R2.1@88.138,95.388 ; R2.1@87.533,95.584 ccw(c87.23,95.974) 87.657,96.221
RESET: 1.1 J1.28 R5.1 U3.13 | length 53.7
  Top Layer w0.254: 1.1 cw(c85.527,89.098) 85.527,90.805 87.133,90.805 cw(c87.133,89.789) R5.1 ; R5.1@88.149,89.216 cw(c88.149,88.446) 88.694,88.99 ; R5.1@88.265,89.419 ccw(c88.594,89.747) v9@88.811,89.336 ; R5.1@88.366,89.694 ccw(c88.88,89.852) v9@88.754,89.329 ; R5.1@88.368,89.689 ccw(c89.269,89.689) 88.632,89.052 ; R5.1@88.589,89.811 ccw(c88.916,89.899) v9@88.821,89.574 ; R5.1@88.622,89.689 ccw(c90.136,89.689) 89.065,88.619 ; R5.1@88.692,89.561 cw(c88.426,90.065) 88.022,89.662 89.196,88.488 ; R5.1@88.694,89.426 ccw(c89.337,89.279) 88.871,88.813 ; 88.792,89.054 cw(c88.979,89.105) v9@88.87,89.265 ; v9@88.942,89.37 ccw(c89.866,89.159) 89.196,88.488 ; U3.13 cw(c90.732,90.025) 89.196,88.488
  Bottom Layer w0.254: v9@88.651,89.53 ccw(c88.355,89.826) 88.773,89.826 ccw(c89.191,89.826) v9@88.895,89.53 ; v9@88.9,89.281 v9(88.773,89.408) 88.773,89.927 cw(c91.288,89.927) 91.288,92.442 96.661,92.442 cw(c96.661,90.17) 98.933,90.17 98.933,89.408 ccw(c100.457,89.408) 100.457,87.884 ccw(c100.457,89.408) 101.981,89.408 101.981,91.948 cw(c104.521,91.948) 104.521,94.488 J1.28 ; J1.28@106.724,93.77 ccw(c104.989,92.035) 104.989,94.488 ccw(c104.989,96.941) J1.28@106.724,95.206 ; J1.28@106.903,93.949 ccw(c105.602,92.648) 105.602,94.488 ccw(c105.602,96.328) J1.28@106.903,95.027 ; J1.28@107.083,94.129 ccw(c106.216,93.262) 106.216,94.488 ccw(c106.216,95.714) J1.28@107.083,94.847
TXLED: LED2.2 U3.22 | length 14.3
  Top Layer w0.203: v3@97.61,77.214 cw(c97.85,76.799) LED2.2@97.974,77.262 ; v3@97.642,77.447 ccw(c97.745,77.549) 97.782,77.409 ccw(c97.82,77.269) v3@97.68,77.306 ; v3@97.665,77.417 ccw(c97.869,77.535) LED2.2@97.808,77.307 ; LED2.2@97.793,77.119 ccw(c97.536,77.083) v3(97.536,77.343) ; LED2.2@97.861,77.448 cw(c97.674,77.563) v3@97.674,77.343 ; LED2.2@97.909,77.514 cw(c97.536,77.835) v3(97.536,77.343) ; LED2.2 ccw(c97.674,76.476) v3@97.674,77.343 ; v3(97.536,77.343) v3@97.674,77.343
  Top Layer w0.254: U3.22 90.732,83.294 ccw(c93.272,83.294) v2@91.476,81.498 ; 91.376,81.644 ccw(c91.647,81.829) v2@91.586,81.507
  Bottom Layer w0.203: v2@91.496,81.301 cw(c91.326,81.046) 91.627,81.106 cw(c91.928,81.166) v2@91.673,81.336 ; v2(91.567,81.407) ccw(c93.713,81.407) 92.196,79.889 92.843,79.242 ccw(c94.361,80.759) 94.361,78.613 94.711,78.613 ccw(c94.711,79.301) 95.197,78.814 cw(c95.631,78.381) 95.631,78.994 cw(c95.631,78.381) 96.065,78.814 v3(97.536,77.343) ; v3@97.388,77.343 ccw(c97.029,77.343) 97.283,77.596 ccw(c97.536,77.85) v3@97.536,77.491
VCC: C6.2 L1.2 R3.2 R4.1 R5.2 R6.2 R7.2 U3.14 U3.34 | length 76.6
  Top Layer w0.254: R5.2@85.953,89.104 cw(c86.133,88.578) 86.452,89.033 ; v9@86.035,88.863 cw(c86.333,87.995) 86.86,88.746 ; R5.2@86.095,89.662 ccw(c87.078,89.662) 87.078,88.679 87.286,88.679 cw(c87.286,86.397) 88.9,88.011 ccw(c90.491,89.602) 90.491,87.352 U3.14 ; C6.2 cw(c103.632,92.255) 104.521,92.255 104.521,92.202 v6(104.267,92.202) v6@104.013,92.202
  Top Layer w0.305: U3.34 100.635,83.352 cw(c100.635,80.812) 102.431,82.608 103.153,81.886 cw(c101.357,80.09) 103.897,80.09 R6.2 R7.2 ; R6.2@103.517,79.965 ccw(c102.362,80.684) 103.686,80.993 ; R7.2@103.581,77.506 ccw(c102.816,78.27) 103.897,78.27 ccw(c104.978,78.27) R7.2@104.214,77.506 ; R6.2@103.581,79.212 cw(c102.816,78.448) 103.897,78.448 cw(c104.978,78.448) R6.2@104.214,79.212 ; 103.776,80.607 ccw(c104.556,80.789) R6.2@104.133,80.109
  Top Layer w1.27: L1.2 C6.2 ccw(c103.204,93.572) 103.809,93.572 103.809,95.377 ; 102.077,93.144 cw(c102.077,90.012) v6@104.292,92.227 ; R3.2 103.809,95.377 ; R3.2@102.844,95.412 cw(c102.807,94.411) 103.809,94.411 ; R3.2@102.866,95.403 cw(c101.058,93.33) C6.2@103.809,93.33 ; C6.2@103.809,93.316 cw(c106.518,93.316) R4.1@104.78,95.393 ; R4.1 ccw(c104.876,95.34) 104.876,95.377 103.809,95.377
  Bottom Layer w0.254: v9(85.979,89.027) ccw(c87.071,90.119) 87.071,88.575 88.448,88.575 ccw(c88.448,89.535) 89.408,89.535 89.408,89.997 cw(c91.447,89.997) 91.447,92.035 96.306,92.035 cw(c96.306,89.916) 98.425,89.916 98.425,89.639 ccw(c100.688,89.639) 100.688,87.376 101.981,87.376 ccw(c101.981,89.916) 104.267,88.809 ; v9@86.024,88.86 cw(c86.132,88.456) 86.341,88.818 cw(c86.55,89.18) v9@86.146,89.072
  Bottom Layer w0.762: v6(101.219,82.804) 103.523,85.108 ccw(c101.727,86.904) 104.267,86.904 104.267,88.809 v6(104.267,92.202)
XTAL1: C8.1 Cry1.1 U3.17 | length 9.7
  Top Layer w0.203: Cry1.1 89.154,85.471 cw(c90.074,84.551) 90.074,85.852 90.17,85.852
  Top Layer w0.254: Cry1.1@87.648,83.738 cw(c86.616,82.706) C8.1@88.076,82.706 ; Cry1.1@87.828,83.918 cw(c87.229,83.319) 88.076,83.319 ; C8.1@87.84,82.609 ccw(c87.09,83.042) 87.926,83.266 ; C8.1@87.883,82.666 ccw(c87.417,83.132) 88.076,83.132 ccw(c88.735,83.132) C8.1@88.269,82.666 ; Cry1.1 88.076,84.136 C8.1 ; 88.001,82.985 ccw(c88.439,83.102) C8.1@88.212,82.709 ; 88.076,83.327 cw(c88.658,83.327) Cry1.1@88.247,83.738 ; 90.17,85.852 U3.17
XTAL2: C7.2 Cry1.3 U3.16 | length 12.6
  Top Layer w0.254: Cry1.3@86.251,86.188 ccw(c85.226,87.213) C7.2@86.676,87.213 ; Cry1.3@86.431,86.008 ccw(c85.84,86.599) 86.676,86.599 ; C7.2@86.44,87.316 cw(c85.685,86.881) 86.527,86.655 ; Cry1.3@86.466,85.888 cw(c87.142,85.894) 86.843,86.5 ; C7.2@86.483,87.26 cw(c86.017,86.794) 86.676,86.794 cw(c87.335,86.794) C7.2@86.869,87.26 ; 86.604,86.945 cw(c87.036,86.83) C7.2@86.812,87.217 ; Cry1.3@86.614,86.36 cw(c87.534,85.44) Cry1.3@86.676,86.418 ; 86.676,86.607 ccw(c87.269,86.607) Cry1.3@86.85,86.188 ; C7.2 Cry1.3@86.676,86.418 ; Cry1.3@86.719,85.89 cw(c87.591,85.898) 87.205,86.679 ; Cry1.3@86.857,86.222 ccw(c87.291,85.788) 86.677,85.788 86.676,85.79 Cry1.3@86.676,86.418 ; U3.16 89.607,86.352 cw(c89.607,86.813) 89.281,86.487 ccw(c88.668,85.874) 88.668,86.741 87.534,86.741 ccw(c87.534,85.44) Cry1.3@86.676,86.418

## Polygon pours and split planes (outlines as drawn)
no net on Top Solder "Bottom Layer-No Net" (solid): 94.488,94.361 95.123,94.996 95.123,97.282 94.488,97.917 93.726,97.917 93.091,97.282 93.091,94.996 93.726,94.361 94.488,94.361
GND on Bottom Layer "Bottom Layer-No Net" (solid, pour order 3): 78.486,102.489 78.486,71.247 109.855,71.247 109.855,102.616
GND on Top Layer "Bottom Layer-No Net" (solid, pour order 5): 78.486,102.489 109.855,102.489 110.109,102.489 110.109,71.247 78.359,71.247

## Other copper
Top Layer:
  rectangle net GND: 102.235,89.535 105.156,90.932
  text "MAGI" at 80.264,96.647 h1
  text "USB" at 81.28,75.438 h1
  text "Core" at 80.78,73.914 h1
Bottom Layer:
  rectangle net GND: 91.344,83.109 96.678,88.443
  text "MAGI" at 107.188,73.787 h0.8

## Silkscreen, mask and mechanical layers (free items; w line width, h text height)
Top Overlay:
  circle w0.33: c104.595,97.409 r0.18
  text "RX" at 95.607,79.121 h1
  text "LED" at 88.646,78.613 h1
  text "TX" at 95.504,76.581 h1
Bottom Overlay:
  text "MicroUSB" at 91.059,98.806 h1
  text "AREF" at 95.377,97.79 h0.8
  text "5V" at 97.409,97.79 h0.8
  text "3V3" at 100.203,97.79 h0.8
  text "GND" at 102.87,97.79 h0.8
  text "D0" at 84.074,93.98 h1
  text "RST" at 105.664,93.98 h1
  text "D1" at 84.074,91.44 h1
  text "A5" at 105.664,91.419 h1
  text "D2" at 84.074,88.9 h1
  text "A4" at 105.664,88.858 h1
  text "D3" at 84.074,86.36 h1
  text "A3" at 105.664,86.296 h1
  text "D4" at 84.074,83.82 h1
  text "A2" at 105.664,83.735 h1
  text "D5" at 84.074,81.28 h1
  text "A1" at 105.664,81.174 h1
  text "D6" at 84.074,78.74 h1
  text "A0" at 105.664,78.613 h1
  text "D7" at 87.249,75.311 h1
  text "D8" at 89.764,75.311 h1
  text "D9" at 92.278,75.311 h1
  text "D10" at 95.072,75.257 h0.8
  text "D11" at 97.32,75.257 h0.8
  text "D12" at 100.101,75.257 h0.8
  text "D13" at 102.616,75.257 h0.8
Bottom Solder:
  rectangle: 91.313,83.058 96.901,88.646